# Altium PCB MADI_STM32G4_PCB_L4.PcbDoc (part 2 of 3)
Units mm, origin at the board's own origin, x right, y up, seen from the top; angles counter-clockwise.
Board outline 30 x 21.59 mm, 4 copper layers (L1, L2 (GND), L3 (GND), L4), stack 1.525 mm thick; 52 components, 52 nets, 268 pads, 180 vias.
Unrouted connection lines stored in the file: 135.
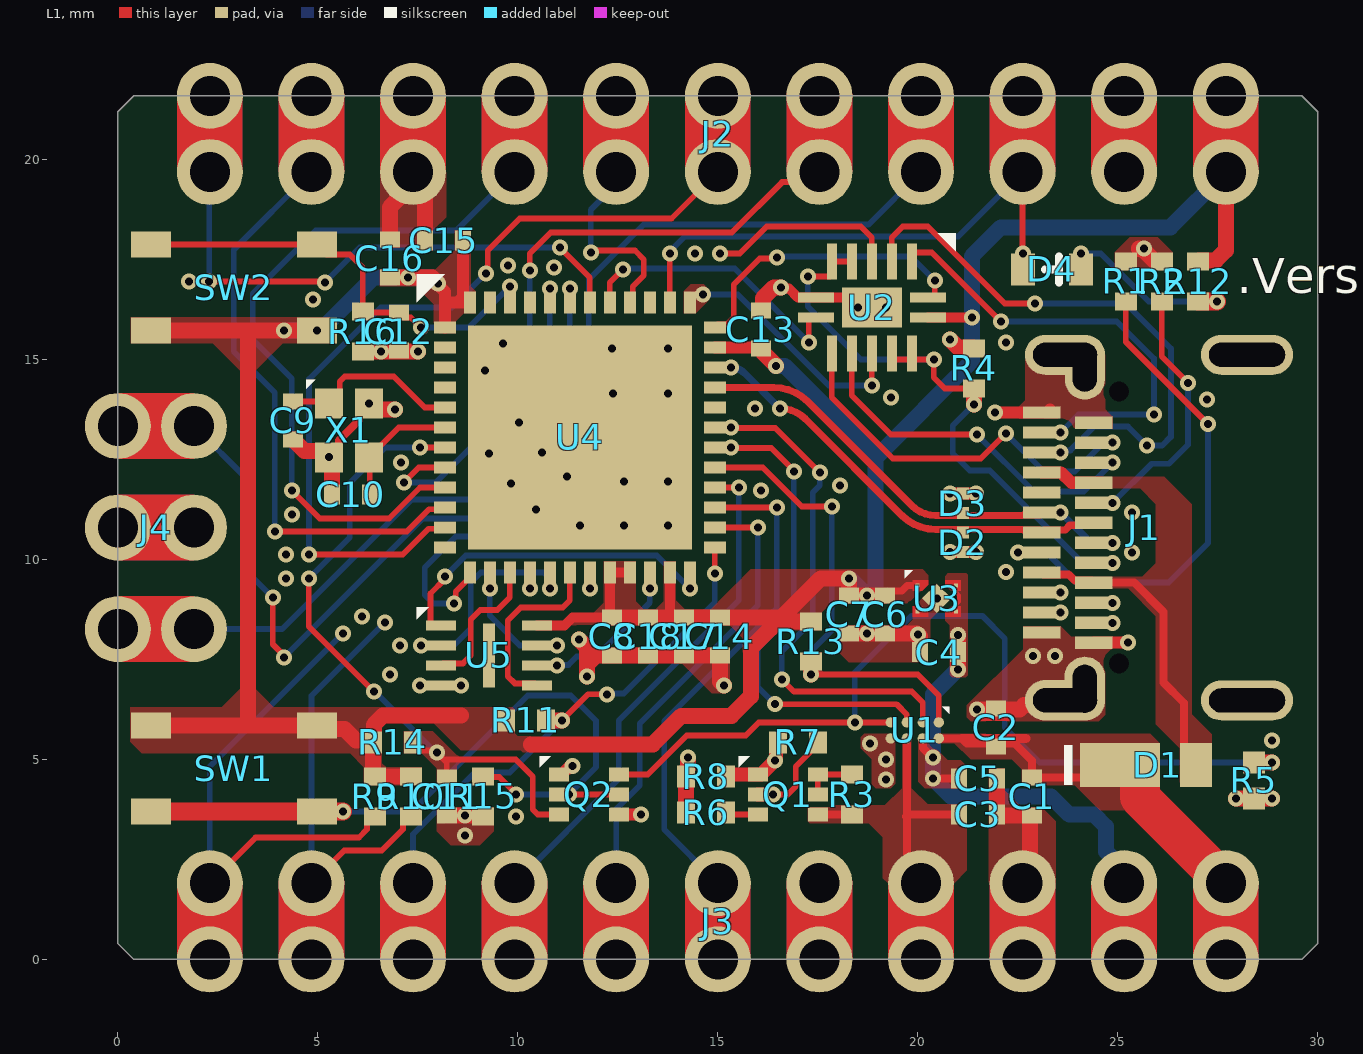
[diagram p0: L1 view]

## Via types
v1: diameter 0.4, hole 0.2, L1 to L4, tented both sides, 180 vias

## Nets (pads, with @x,y where several pads share a name; then routed paths per layer and width w, separated by ;. In a path a pad name is that pad's centre, name@x,y a point inside that pad or via, vN(x,y) a via of type N, cw(c..) or ccw(c..) an arc to the next point about the centre after c; other vN are vias at no path point) (continued)
+VBUS: (continued)
  L1 w0.305: J1.A9@23.1,12.175 23.579,12.175 23.839,11.915 J1.B4@24.4,11.915
+VIN_5V0: C1.2 C2.2 D1.1 J3.1 U1.A2 | length 11.2
  L1 w0.2: U1.A2@20.525,5.525 21.104,5.525 21.229,5.4 22.425,5.4 22.85,4.975 C1.2@22.85,4.55 24.825,4.55 D1.1@25.05,4.775
  L1 w0.23: 21.104,5.525 22.7,5.525
  L1 w1: D1.1@25.05,4.805 25.55,4.805 25.55,4.055 J3.1@27.7,1.905
+VSYS: C4.2 C5.2 J3.2 U1.B2 U3.3 U3.4 | length 12.9
  L1 w0.1: U3.3@20.955,8.7 20.955,8.869 21.033,8.946 21.033,9.104 20.955,9.181 U3.4@20.955,9.35
  L1 w0.2: U1.B2@20.125,5.525 20.131,5.519 20.131,5.287 v1(20.375,5.043) ; 20.6,4.525 C5.2@21.025,4.525
  L1 w0.4: v1(21,7.25) v1(21,8.109)
  L4 w0.4: v1(21,8.109) v1(21,7.25) 20.375,6.625 v1(20.375,5.043) v1(20.375,4.525) 20.825,4.075 23.328,4.075 23.786,3.617 24.408,3.617 24.702,3.323 24.702,2.701 25.16,2.243 J3.2@25.16,1.905
BOOT0: C12.2 R16.2 SW2.1 SW2.2 U4.46 | length 11
  L1 w0.146: SW2.1@0.825,17.875 SW2.2@4.975,17.875 5.225,17.625 5.8,17.625 6.125,17.3 R16.2@6.125,16.2 6.15,16.175 C12.2@7.075,16.175 ; C12.2@7.025,16.175 7.15,16.05 7.325,16.05 v1(7.575,15.8)
  L4 w0.146: v1(7.575,15.8) 8.775,15.8 v1(9.8,16.825)
EN_VBAT_MON: Q1.2 R7.2 U4.19 | length 9.8
  L1 w0.146: v1(16.375,4.125) 16.75,4.125 16.95,4.325 16.95,4.825 17.5,5.375 R7.2@17.5,5.425
  L1 w0.35: Q1.2@16,4.125 v1(16.375,4.125)
  L2 (GND) w0.146: v1(11.8,9.275) 11.8,8.9 15.075,5.625 15.075,4.75 15.7,4.125 v1(16.375,4.125)
GND: C1.1 C2.1 C3.1 C4.1 C5.1 C6.1 C7.1 C8.1 C9.2 C10.2 C11.1 C12.1 C13.1 C14.1 C15.1 C16.1 C17.1 C18.1 D2.2 D3.2 J1.A1 J1.A12 J1.B1 J1.B12 J1.S1 J1.S2 J1.S3 J1.S4 J2.2 J2.9 J3.3 J3.5 J4.2 Q1.1 Q2.1 Q2.4 R1.1 R2.1 R4.1 R5.1 R7.1 R8.1 R15.1 R16.1 U1.D2 U2.7 U2.15 U3.2 U3.5 U4.49 U5.4 X1.2 X1.4 | length 35.4
  L1 w0.2: X1.2@5.275,12.55 5.525,12.8 5.525,12.975 6.025,13.475 6.025,13.65 v1(6.275,13.9)
  L1 w0.25: v1(16.575,16.8) 16.604,16.771 16.779,16.771 17,16.55 18.6,16.55 U2.15@18.85,16.3
  L1 w0.3: Q2.1@11.025,4.625 11.1,4.625 11.293,4.818 11.343,4.818 v1(11.362,4.837) ; Q2.4@12.525,3.625 v1(13.075,3.625) ; v1(20.8,10.185) v1(21.45,10.185) ; v1(20.8,11.65) v1(21.45,11.65) ; v1(21.925,13.675) J1.A12@23.1,13.675 ; J1.A12@23.3,13.75 J1.A12@23.302,13.748 ; J1.B12@24.4,7.915 24.402,7.917 25.242,7.917 v1(25.25,7.925)
  L1 w0.35: R8.1@15.2,4.575 15.25,4.625 16.075,4.625 v1(16.425,4.975) 16.425,4.989 16.45,5.014 16.45,5.375 R7.1@16.5,5.425
  L1 w0.4: C9.2@4.375,13 4.425,13 4.425,12.95 4.663,12.712 5.125,12.712 v1(5.275,12.562) X1.2@5.275,12.55 5.35,12.475 C10.2@5.35,11.625 ; R16.1@6.125,15.2 v1(7.5,15.2) ; v1(6.275,13.9) 6.425,13.75 v1(6.925,13.75) ; C16.1@6.8,18 6.8,18.8 J2.9@7.38,19.38 ; J2.9@7.38,19.685 J2.9@7.38,19.38 ; C15.1@7.675,17.975 7.675,19.052 7.38,19.347 J2.9@7.38,19.38 ; C11.1@8.225,3.6 v1(8.675,3.6) 9.1,3.6 R15.1@9.125,3.575 ; v1(11.525,8) 11.725,7.8 11.725,7.366 ; v1(11.725,7.075) 11.725,7.366 ; v1(15.15,6.85) 15.05,6.95 C14.1@15.05,7.6 C17.1@14.15,7.6 C8.1@12.35,7.6 11.959,7.6 11.725,7.366 ; C13.1@16.075,16.225 16.125,16.225 16.125,16.525 16.4,16.8 v1(16.575,16.8) ; C7.1@18.275,8.15 v1(18.725,8.15) C6.1@19.175,8.15 19.961,8.15 19.986,8.125 v1(20,8.125) 20.05,8.075 C4.1@20.05,7.68 ; v1(20.8,15.5) 21,15.3 21.375,15.3 R4.1@21.4,15.275 ; v1(21.475,6.25) 22.547,6.25 22.656,6.359 23.318,6.359 J1.S3@23.681,6.722 ; C3.1@21.975,3.6 C1.1@22.8,3.6 ; C3.1@21.975,3.625 C5.1@21.975,4.525 ; J3.3@22.62,1.905 22.8,2.085 C1.1@22.8,3.6 ; C1.1@22.85,3.6 C1.1@22.8,3.6 ; v1@25.525,17.775 25.535,17.765 25.61,17.765 25.925,17.45 R2.1@25.975,17.45 ; v1(27.95,4.025) v1(28.85,4.025)
  other v1: 8.675,3.1 9.95,3.575 19.2,4.5 19.2,5 18.8,5.4 28.85,5.475 7.55,6.85 8.575,6.85 6.8,7.125 22.881,7.59 23.431,7.59 7.05,7.85 6.1,8.575 20.475,9.025 4.2,9.525 22.2,9.68 4.2,10.125 25.35,10.175 11.55,10.85 12.65,10.85 13.75,10.85 4.35,11.125 25.35,11.175 10.45,11.25 16.075,11.725 18.05,11.85 9.825,11.9 12.65,11.95 13.75,11.95 11.225,12.075 7.075,12.425 9.275,12.65 10.6,12.675 10.025,13.425 15.925,13.775 27.225,14 19.325,14.05 12.375,14.15 13.75,14.15 9.175,14.725 6.575,15.2 12.35,15.275 13.75,15.275 9.625,15.4 22.2,15.425 18.5,16.3 19.2,16.3 4.875,16.5 1.775,16.95 10.9,17.3 9.75,17.35 14.425,17.65 25.65,17.775
MR: Q2.6 R5.2 U1.D1 | length 22.9
  L1 w0.146: Q2.6@12.525,4.625 13.25,4.625 14.225,5.6 15.7,5.6 16.025,5.925 v1(18.425,5.925) U1.D1@19.325,5.925
  L1 w0.4: R5.2@28.4,4.925 v1(28.85,4.925)
  L4 w0.146: v1(18.425,5.925) 18.425,7.172 19.842,8.589 21.611,8.589 22.175,8.025 22.175,5.8 23.05,4.925 v1(28.85,4.925)
NetC9_1: C9.1 U4.5 X1.1 | length 4.6
  L1 w0.146: C9.1@4.375,13.95 5.225,13.95 X1.1@5.275,13.9 5.55,14.175 5.55,14.45 5.675,14.575 6.9,14.575 7.675,13.8 U4.5@8.175,13.8
NetC10_1: C10.1 U4.6 X1.3 | length 3.6
  L1 w0.146: X1.3@6.126,12.825 X1.3@6.55,12.825 ; C10.1@6.3,11.625 6.3,12.525 X1.3@6.275,12.55 X1.3@6.55,12.825 ; U4.6@8.175,13.3 7.025,13.3 X1.3@6.55,12.825
NetD4_A: D4.A R12.1 | length 4.2
  L1 w0.45: R12.1@27,16.45 v1(27.475,16.45)
  L4 w0.146: v1(24.075,17.65) 24.575,17.65 25.775,16.45 v1@27.35,16.45
NetJ1_A5: J1.A5 R1.2 | length 12.4
  L1 w0.146: R1.2@25.2,16.45 25.2,15.441 27.251,13.39 v1(27.256,13.39)
  L4 w0.146: v1(22.506,10.17) 23.226,10.17 23.971,9.425 26.275,9.425 27.256,10.406 v1(27.256,13.39)